# Altium PCB PC110.PcbDoc (part 8 of 24)
Units mm, origin at the board's own origin, x right, y up, seen from the top; angles counter-clockwise.
Board outline 150.05 x 107.35 mm, 10 copper layers (In2.Cu, F.Cu, B.Cu, In1.Cu, In3.Cu, In4.Cu, In5.Cu, In6.Cu, In7.Cu, In8.Cu); 936 components, 1434 nets, 4891 pads, 6088 vias.
Unrouted connection lines stored in the file: 2995.
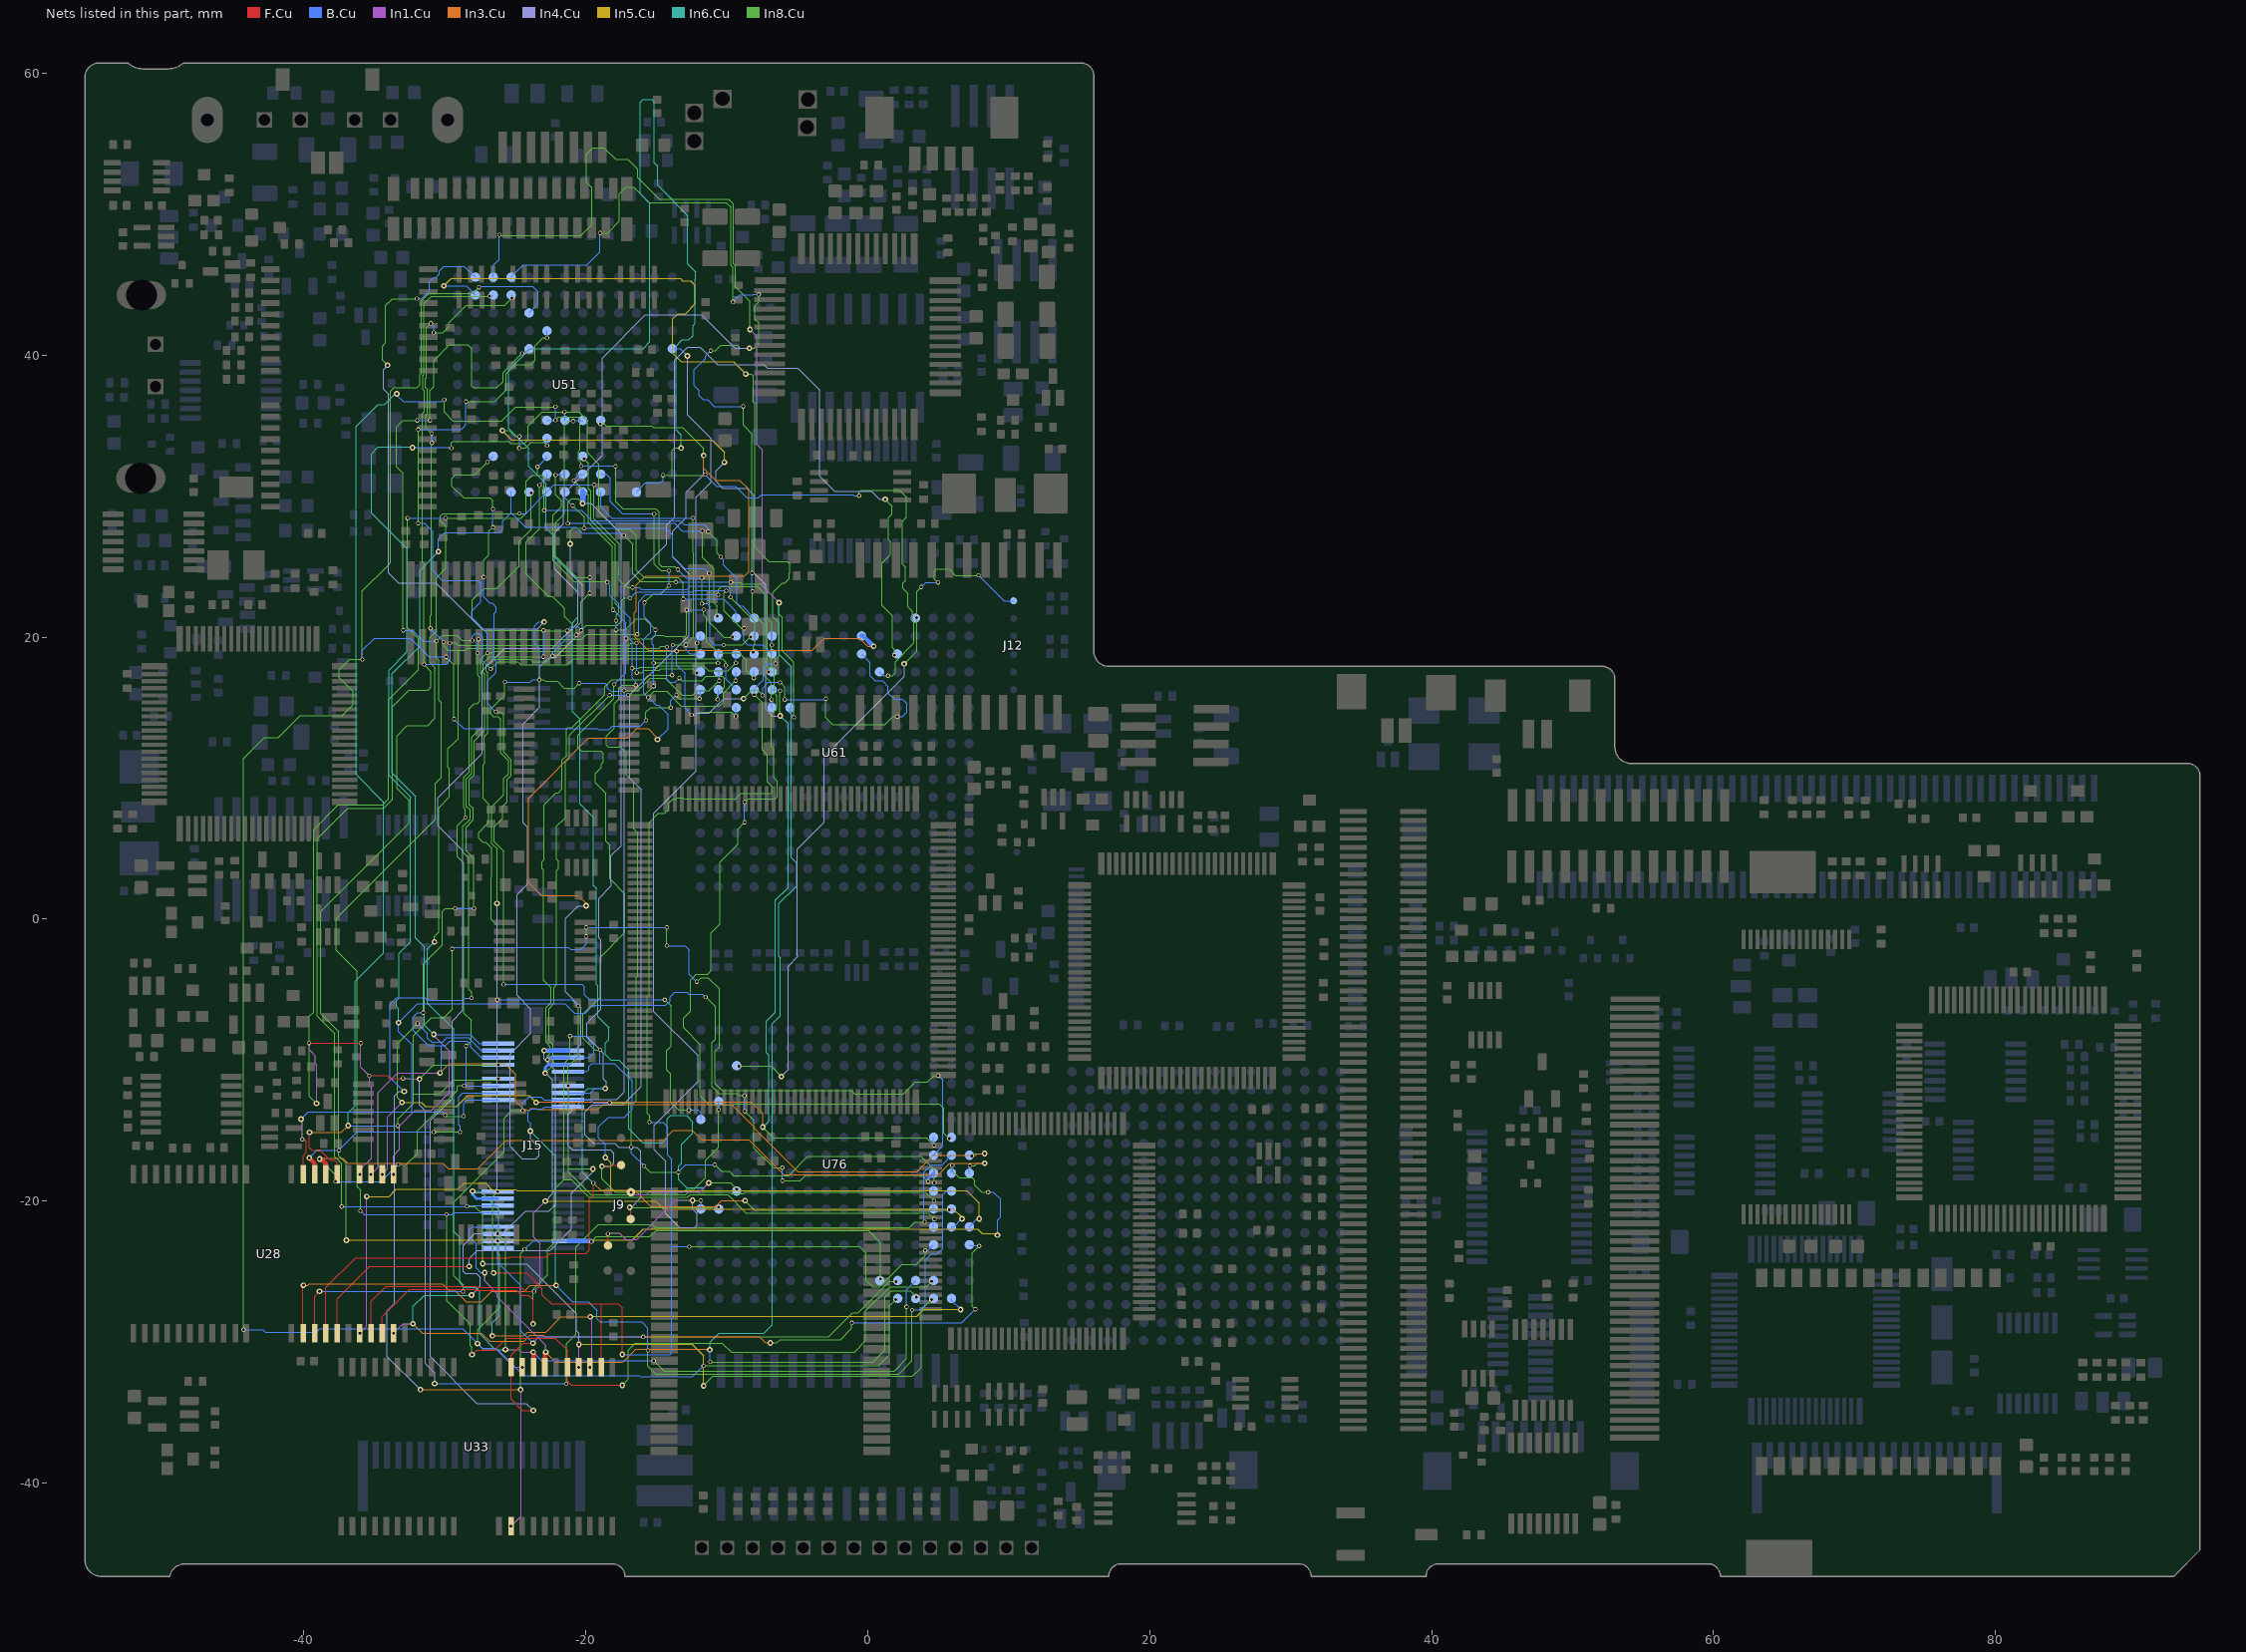
[diagram p15: the nets of this part, all layers, seen from the top]

## Via types
v1: diameter 0.3, hole 0.2, B.Cu to In8.Cu, tented both sides, 1934 vias
v2: diameter 0.4, hole 0.2, F.Cu to B.Cu, tented both sides, 1902 vias
v3: diameter 0.3, hole 0.2, F.Cu to In1.Cu, tented both sides, 1729 vias
v4: diameter 0.6, hole 0.3, F.Cu to B.Cu, tented both sides, 354 vias
v5: diameter 0.5, hole 0.3, F.Cu to B.Cu, tented both sides, 136 vias
v6: diameter 0.4, hole 0.2, B.Cu to In8.Cu, tented both sides, 12 vias
v7: diameter 0.3, hole 0.2, F.Cu to B.Cu, tented both sides, 6 vias
v8: diameter 0.6, hole 0.2, F.Cu to B.Cu, tented both sides, 4 vias
v9: diameter 0.5, hole 0.2, B.Cu to In8.Cu, tented both sides, 3 vias
v10: diameter 0.5, hole 0.2, F.Cu to B.Cu, tented both sides, 2 vias
v11: diameter 0.4, hole 0.3, F.Cu to B.Cu, tented both sides, 2 vias
v12: diameter 0.3, hole 0.2, F.Cu to In4.Cu, tented both sides, 2 vias
v13: diameter 0.6, hole 0.3, B.Cu to In8.Cu, tented both sides, 1 vias
v14: diameter 0.3, hole 0.2, F.Cu to In3.Cu, tented both sides, 1 vias

## Nets (pads, with @x,y where several pads share a name; then routed paths per layer and width w, separated by ;. In a path a pad name is that pad's centre, name@x,y a point inside that pad or via, vN(x,y) a via of type N, cw(c..) or ccw(c..) an arc to the next point about the centre after c; other vN are vias at no path point) (continued)
CPU_BE1#: J9.3 U51.L13 U61.L4 U76.C10 | length 174.7
  In1.Cu w0.08: v3(-16.795,-19.365) -16.64,-19.52 -15.67,-19.52 -15.49,-19.34 -11.91,-19.34 v2(-11.27,-18.7)
  In6.Cu w0.08: v2(-13.24,33.42) -13.24,34.34 -13.6,34.7 -13.6,40.64 -13.15,41.09 -12.69,41.09 -12.39,41.39 -12.39,42.1 -12.24,42.25 -12.24,45.33 -12.22,45.35 -12.22,45.92 -12.76,46.46 -12.76,49.92 -14.89,52.05 -14.89,53.4 -15.13,53.64 -15.13,57.95 -15.32,58.14 -15.95,58.14 -16.15,57.94 -16.15,51.46 -15.45,50.76 -15.45,40.95 -15.92,40.48 -23.95,40.48 -25.47,38.96 -25.47,34.8 -24.07,33.4 -24.07,32.13 -22.81,30.87 -22.81,27.75 -22.21,27.15 -22.21,25.68 -20.54,24.01 -20.54,21.45 -20.96,21.03 -20.96,14.74 -20.42,14.2 -20.42,8.19 -19.45,7.22 -19.45,2.4 -19.25,2.2 -19.25,-4.62 -19.13,-4.74 -19.13,-6.91 -18.35,-7.69 -18.35,-8.53 -18.6,-8.78 -18.6,-9.61 -18.22,-9.99 -17.66,-9.99 -16.94,-10.71 -16.94,-14.88 -15.96,-15.86 -14.53,-15.86 -14.21,-15.54 -14.21,-14.16 -13.98,-13.93 -12.86,-13.93 -12.41,-14.38 -12.41,-15.2 -13.19,-15.98 -13.19,-17.3 -13.4,-17.51 -13.4,-18.47 -12.84,-19.03 -11.6,-19.03 v2(-11.27,-18.7)
  In8.Cu w0.08: v1(-14.52,31.49) -13.87,31.49 ; v2(-13.24,33.42) -13.69,33.42 -13.86,33.25 -13.86,31.5 -13.87,31.49 ; v1(-11.53,31.53) -11.57,31.49 -13.87,31.49 ; v2(-11.27,-18.7) -9.75,-18.7 v1(-9.3,-19.15) ; v1(-0.61,30.03) -0.61,30.31 -0.48,30.44 2.25,30.44 2.75,29.94 2.75,28.52 2.45,28.22 2.45,25.19 2.67,24.97 2.67,23.99 2.51,23.83 2.51,23.45 2.84,23.12 2.84,22.14 3.16,21.82 3.16,21.2 3.29,21.07 3.29,19.59 1.96,18.26 1.96,17.47 1.76,17.27 v1(1.44,17.27)
  B.Cu w0.08: U51.L13@-16.4,30.3 -16.4,30.31 -15.77,30.94 -14.71,30.94 -14.52,31.13 v1(-14.52,31.49) ; v1(-11.53,31.53) -10.72,30.72 -9.39,30.72 -8.57,29.9 -7.77,29.9 -7.56,30.11 -1.05,30.11 -0.97,30.03 v1(-0.61,30.03) ; U61.L4@0.815,17.57 1.115,17.27 v1(1.44,17.27)
CPU_BE2#: J9.8 U51.N5 U61.K3 U76.A11 | length 106.9
  F.Cu w0.08: v3(-18.43,-22.32) -18.42,-22.33 J9.8@-18.42,-23.14
  In1.Cu w0.08: v3(-18.43,-22.32) -18.37,-22.26 -17.62,-22.26 -17.15,-22.73 -16.4,-22.73 -13.61,-19.94 v2(-12.42,-19.94)
  In4.Cu w0.08: v2(-12.79,39.95) -12.79,35.77 -11.11,34.09 -11.11,30.99 -12.16,29.94 -12.16,14.61 ; v2(-12.42,-19.94) -12.42,-20.56 -12.09,-20.89 -12.09,-21.68 -12.29,-21.88 -13.34,-21.88 -14.33,-20.89 -14.33,-17.16 -15.15,-16.34 -15.15,-14.61 -12.04,-11.5 -12.04,-9.68 -15.17,-6.55 -15.17,7.52 -12.16,10.53 -12.16,14.61 ; v2(-8.81,15.65) -10.2,15.65 -11.24,14.61 -12.16,14.61
  In8.Cu w0.08: v2(-12.42,-19.94) -12.4,-19.96 v1(-11.84,-19.96) ; v2(-8.81,15.65) -8.23,16.23 -7.8,16.23 v1(-7.45,15.88) ; v1(-6.21,16.8) -5.88,16.47 v1(-5.88,15.58) ; v1(-2.97,15.64) -2.97,14.29 -2.48,13.8 1.21,13.8 1.78,14.37 v1(2.1,14.37)
  B.Cu w0.08: U51.N5@-13.86,40.46 -13.3,40.46 v2(-12.79,39.95) ; U76.A11@-11.84,-20.55 v1(-11.84,-19.96) ; v1(-7.45,15.88) -7.45,16.4 -7.05,16.8 v1(-6.21,16.8) ; v1(-5.88,15.58) -3.03,15.58 v1(-2.97,15.64) ; U61.K3@-0.455,18.84 0.18,18.205 0.18,17.26 0.53,16.91 1.03,16.91 1.45,16.49 1.45,16.05 1.89,15.61 2.46,15.61 2.77,15.3 2.77,14.68 2.46,14.37 v1(2.1,14.37)
CPU_BE3#: J9.5 U51.J9 U61.K2 U76.B11 | length 121.2
  F.Cu w0.08: v2(-16.89,-20.44) -16.82,-20.51 J9.5@-16.82,-21.265
  In3.Cu w0.08: v2(-11.64,32.89) -11.64,31.98 -10.79,31.13 -9.09,31.13 -8.44,30.48 -8.44,24.67 -8.76,24.35 -15.76,24.35 -16.41,23.7 -16.41,21.88 -16.55,21.74 -16.55,20.05 -15.56,19.06 -3.95,19.06 -3.1,19.91 -0.58,19.91 -0.03,19.36 v2(0.42,19.36)
  In4.Cu w0.08: v2(-16.89,-20.44) -16.78,-20.44 -16.09,-19.75 -16.095,-19.745 -16.095,-16.465 -16.38,-16.18 -17.64,-16.18 -17.93,-15.89 -19.47,-15.89 -20.05,-15.31 -20.05,-13.67 -19.55,-13.17 -17.39,-13.17 -16.08,-11.86 -16.08,9.2 -16.88,10 -16.88,15.92 -12.67,20.13 -12.67,24.5 -13.85,25.68 -13.85,27.53 -12.9,28.48 -12.9,30.27 -11.64,31.53 v2(-11.64,32.89)
  In8.Cu w0.08: v1(-18.96,35.12) -18.68,35.12 -18.56,35 -15.34,35 -15.22,34.88 -13.13,34.88 -11.64,33.39 v2(-11.64,32.89) ; v2(-16.89,-20.44) -16.86,-20.47 -11.06,-20.47 -11.01,-20.42 v1(-10.58,-20.42)
  B.Cu w0.08: v1(-18.96,35.12) -18.96,35.36 U51.J9@-18.94,35.38
  B.Cu w0.3: U61.K2@-0.455,20.11 -0.34,20.11 0.41,19.36 v2(0.42,19.36)
CPU_BLAST#: J12.1 U61.N1 U76.C3 | length 51.3
  In4.Cu w0.08: v2(-6.13,-11.15) -5.65,-10.67 -5.65,-3.33 -4.96,-2.64 -5,-2.6 -5,4.98 -3.09,6.89 -3.09,11.54 2.59,17.22 v2(2.59,18.11)
  In8.Cu w0.08: v1(-9.13,-10.43) -6.85,-10.43 v2(-6.13,-11.15) ; v2(2.59,18.11) 3.47,18.99 v1(3.47,21.4) 3.47,23.24 v1(3.79,23.56) ; v1(4.98,23.89) 4.73,24.14 4.73,24.67 4.88,24.82 5.78,24.82 6.21,24.39 v1(7.86,24.39)
  B.Cu w0.08: U76.C3@-9.3,-10.39 -9.26,-10.43 v1(-9.13,-10.43) ; U61.N1@3.355,21.38 3.375,21.4 v1(3.47,21.4) ; v1(3.79,23.56) 4.12,23.89 v1(4.98,23.89) ; v1(7.86,24.39) 9.67,22.58 J12.1@10.35,22.58
CPU_BRDY#: J9.2 U61.M3 U76.B5 | length 117
  F.Cu w0.08: v2(-18.85,-17.53) -18.32,-17.53 -18.23,-17.44 J9.2@-17.495,-17.44
  In4.Cu w0.08: v2(-18.85,-17.53) -18.23,-17.53 -18.01,-17.31 -18.01,-16.63 -18.04,-16.6 -18.04,-16.58 -18.25,-16.37 -20.95,-16.37 -21.28,-16.04 -21.28,-13.85 -20.21,-12.78 -17.79,-12.78 -17.27,-12.26 -17.27,23.59 -14.27,26.59 -14.27,27.94 -13.71,28.5 -13.71,39.64 -12.77,40.58 -11.9,40.58 -10.65,39.33 -7.36,39.33 -7.13,39.1 -4.98,39.1 -3.42,37.54 -3.42,31.41 -2.35,30.34 0.28,30.34 0.85,29.77 1.23,29.77 v2(1.24,29.78)
  In8.Cu w0.08: v2(-18.85,-17.53) -18.85,-18.39 -17.89,-19.35 -13.05,-19.35 -12.86,-19.16 -12.33,-19.16 -11.51,-18.34 -11.51,-17.11 -10.57,-16.17 v1(-10.57,-13.5) ; v2(1.24,29.78) 1.73,29.29 1.73,28.73 1.47,28.47 1.47,26.93 1.62,26.78 1.62,25.87 1.01,25.26 1.01,22.25 1.75,21.51 1.75,19.26 1.89,19.12 v1(1.89,18.72)
  B.Cu w0.08: v1(-10.57,-13.5) U76.B5@-10.57,-12.93
CPU_BS16#: U51.C11 U76.A6 | length 67.3
  In8.Cu w0.08: v1(-27.23,24.27) -27.23,25.46 -26.87,25.82 -26.87,27.51 v1(-26.58,27.8) ; v1(-26.98,32.42) -27.89,31.51 -29.25,31.51 -29.49,31.27 -29.49,30.71 -28.66,29.88 -26.8,29.88 -26.59,29.67 v1(-26.59,29.1) ; v1(-26.38,14.7) -26.03,14.7 -25.84,14.51 -25.84,11.85 -25.28,11.29 -25.28,10.21 -25.59,9.9 -25.59,8.33 -25.9,8.02 -25.9,7.15 -26.49,6.56 -26.49,5.5 -25.82,4.83 v1(-25.82,-4.63) ; v1(-14.4,-5.71) -13.96,-6.15 -13.96,-9.01 -14.26,-9.31 -14.26,-10.7 -13.97,-10.99 -13.97,-12.99 -13.42,-13.54 v1(-12.68,-13.54)
  B.Cu w0.08: v1(-27.23,24.27) -27.23,22.86 -26.81,22.44 -26.65,22.44 -26.34,22.13 -26.34,21.83 -26.49,21.68 -26.49,18.39 -26.37,18.27 -26.37,17.52 -26.97,16.92 -26.97,15.29 v1(-26.38,14.7) ; v1(-26.98,32.42) U51.C11@-26.56,32.84 ; v1(-26.59,29.1) -26.59,27.81 v1(-26.58,27.8) ; v1(-25.82,-4.63) -20.27,-4.63 -20.09,-4.81 -20.09,-5.36 -19.75,-5.7 -14.41,-5.7 v1(-14.4,-5.71) ; v1(-12.68,-13.54) -12.04,-13.54 -11.84,-13.74 U76.A6@-11.84,-14.2
CPU_D0: J15.1 U28.2 U51.D13 U61.E2 U76.R7 | length 146.9
  In1.Cu w0.08: v3(-33.635,-18.095) -33.635,-16.765 -33.2,-16.33 -33.2,-14.65 -32.11,-13.56 -30.95,-13.56 -29.69,-12.3 -29.69,-9.35 -30.78,-8.26 v2(-30.78,-8.17)
  In6.Cu w0.08: v2(-30.78,-8.17) -31.44,-7.51 -31.44,-1.98 -32.08,-1.34 -32.08,8.73 -33.73,10.38 -33.73,17.41 -31.78,19.36 -31.78,24.74 v2(-30.45,26.07)
  In8.Cu w0.08: v1(-17.3,27.23) -16.67,26.6 -16.67,24.53 -16.11,23.97 -13.66,23.97 v1(-13.6,23.91) v1@-13.6,23.92 ; v1(-9.71,23.9) -9.69,23.88 -9.02,23.88 -8.93,23.79 -7.54,23.79 -7.12,23.37 -7.12,21.35 -6.805,21.035 v1(-6.805,19.44) -6.83,19.415 -6.83,17.92 -6.64,17.73 -6.64,16.03 -6.46,15.85 -6.46,14.92 -6.84,14.54 -6.84,12.24 -6.65,12.05 -6.65,10.01 -6.41,9.77 -6.41,8.69 -6.58,8.52 -8.51,8.52 v1(-8.73,8.3) ; v1@-8.74,6.86 v1@-8.73,6.87 ; v1(-8.73,6.88) v1@-8.73,6.87 ; v1(5.78,-15.55) 5.4,-15.17 5.4,-13.42 5.07,-13.09 -9.49,-13.09 -9.56,-13.16 -11.26,-13.16 -11.88,-12.54 -11.88,-8.88 -13.07,-7.69 -13.07,-7.03 -12.56,-6.52 -12.56,-4.31 -12.46,-4.21 -12.16,-3.91 -11.84,-3.91 -11.38,-3.91 -11.26,-3.79 -11.11,-3.64 -11.11,-1.18 -11.11,-0.97 -10.66,-0.52 -10.47,-0.33 -10.47,4.06 -9.29,5.24 -9.22,5.31 -9.22,6.27 -9.22,6.38 v1@-8.73,6.87
  B.Cu w0.08: v2(-30.78,-8.17) -28.2,-8.17 -27.55,-8.82 -26.17,-8.82 J15.1@-26.16,-8.83 ; v2(-30.45,26.07) -30.45,26.96 -29.98,27.43 -26.1,27.43 -25.88,27.65 -25.88,28.24 -25.3,28.82 -25.29,28.82 ; U51.D13@-25.29,30.3 -25.29,28.82 ; v1(-17.3,27.23) -17.47,27.4 -20.28,27.4 -20.68,27.8 -24.27,27.8 -25.29,28.82 ; v1(-13.6,23.91) -9.72,23.91 v1(-9.71,23.9) ; v1(-8.73,6.88) v1(-8.73,8.3) ; v1(-6.805,19.44) U61.E2@-6.805,20.11 ; v1(5.78,-15.55) 5.86,-15.55 U76.R7@5.94,-15.47
CPU_D1: J15.2 U28.3 U51.F10 U61.E5 U76.P7 | length 136
  In1.Cu w0.08: v3(-34.435,-18.095) -34.05,-17.71 -34.05,-14.01 v2(-33.04,-13)
  In3.Cu w0.08: v2(-23.52,-13) -23.48,-12.96 -8.28,-12.96 -7.45,-13.79 v2(-7.45,-14.75)
  In4.Cu w0.08: v2(-10.17,32.41) -10.77,31.81 -10.77,31.05 -10.3,30.58 -8.58,30.58 -8.08,30.08 -8.08,24.56 -7.24,23.72 -7.24,14.9 -6.76,14.42 v2(-6.21,14.42)
  In5.Cu w0.08: v2(-33.04,-13) -31.66,-13 -31.38,-13.28 -29.15,-13.28 -28.38,-12.51 -24.01,-12.51 v2(-23.52,-13) ; v2(-25.92,34.66) -25.25,33.99 -11.06,33.99 -10.17,33.1 v2(-10.17,32.41)
  In6.Cu w0.08: v2(-7.45,-14.75) -7.025,-14.325 -7.025,-9.625 -7.175,-9.475 -7.175,-7.225 -6.55,-6.6 -6.55,1.35 -5.65,2.25 -5.65,13.86 v2(-6.21,14.42)
  In8.Cu w0.08: v2(-33.04,-13) -33.37,-12.67 -33.37,-8.83 v1(-31.94,-7.4) ; v2(-25.92,34.66) -25.42,34.66 -25,34.24 v1(-24.7,34.24) ; v1(-24.72,33.42) -24.26,33.42 -23.87,33.81 -22.97,33.81 v1(-22.75,33.59) ; v2(-7.45,-14.75) -6.71,-15.49 4.16,-15.49 v1(4.7,-16.03) ; v1(-6.22,16.19) -6.22,14.43 v2(-6.21,14.42)
  B.Cu w0.08: v1(-31.94,-7.4) -31.22,-8.12 -31.22,-8.44 -30.93,-8.73 -30.17,-8.73 -29.84,-8.4 -28.34,-8.4 -27.42,-9.32 -26.17,-9.32 J15.2@-26.16,-9.33 ; v1(-24.72,33.42) -24.7,33.44 v1(-24.7,34.24) ; v1(-22.75,33.59) U51.F10@-22.75,34.11 ; U61.E5@-6.785,16.275 -6.305,16.275 v1(-6.22,16.19) ; U76.P7@4.67,-15.47 4.67,-16 v1(4.7,-16.03)
CPU_D2: J15.3 U28.4 U51.E13 U61.E3 U76.T8 | length 140.8
  In1.Cu w0.08: v3(-35.235,-18.095) -34.72,-17.58 -34.72,-12.28 -33.34,-10.9 v2(-30.34,-10.9)
  In3.Cu w0.08: v2(-30.34,-10.9) -29.69,-10.25 -25.74,-10.25 -24.99,-11 -24.99,-12.88 -24.36,-13.51 -23.99,-13.51 -23.9,-13.42 -23.52,-13.42 -23.44,-13.5 -19.14,-13.5 -18.77,-13.13 -9.67,-13.13 -8.04,-14.76 -8.04,-14.84 -4.96,-17.92 3.47,-17.92 4.66,-16.73 7.67,-16.73 7.78,-16.62 v2(8.29,-16.62)
  In8.Cu w0.08: v1(-31.53,-6.63) -31.53,-3.16 -30.18,-1.81 -30.18,0.54 -29.95,0.77 v1(-29.27,0.77) ; v1(-27.93,0.77) -27.93,4.31 -28.48,4.86 -28.48,6.53 -27.97,7.04 -27.97,7.85 -28.25,8.13 -28.25,9.9 -27.9,10.25 -27.9,12.65 -27.15,13.4 -27.15,17.38 -27.26,17.49 -27.26,18.15 -26.8,18.61 v1(-23.01,18.61) ; v1(-23.87,30.22) -23.88,30.21 -23.88,27.62 -24.73,26.77 -24.73,25.02 -24.75,25.02 -26.32,23.45 -27.22,23.45 -28.04,22.63 -28.04,21.3 -27.23,20.49 v1(-22.99,20.49) -22.96,20.46 v1(-21.31,20.46) ; v1(-20.33,20.49) -19.99,20.83 -17.78,20.83 -17.42,21.19 -17.42,22.64 -17.29,22.77 v1(-16.86,22.77) ; v1(-10.04,23.3) -10.19,23.15 -10.19,21.86 -8.955,20.625 v1(-8.77,20.625) ; v1(7.38,-16.79) 7.55,-16.62 v2(8.29,-16.62)
  B.Cu w0.08: v1(-31.53,-6.63) -31.93,-6.63 -32.25,-6.95 -32.25,-7.86 -31.15,-8.96 -30.25,-8.96 ; v2(-30.34,-10.9) -30.24,-10.8 -30.24,-8.97 -30.25,-8.96 ; v1(-29.27,0.77) v1(-27.93,0.77) ; J15.3@-26.16,-9.83 -26.17,-9.82 -27.43,-9.82 -28.17,-9.08 -28.17,-8.9 -28.43,-8.64 -29.63,-8.64 -29.95,-8.96 -30.25,-8.96 ; U51.E13@-24.02,30.3 -23.94,30.22 v1(-23.87,30.22) ; v1(-23.01,18.61) -22.99,18.63 v1(-22.99,20.49) ; v1(-21.31,20.46) -21.04,20.73 -20.57,20.73 v1(-20.33,20.49) ; v1(-16.86,22.77) -16.43,23.2 -12.46,23.2 -12.35,23.31 -10.05,23.31 v1(-10.04,23.3) ; v1(-8.77,20.625) -8.77,19.73 -8.52,19.48 -7.445,19.48 U61.E3@-6.805,18.84 ; U76.T8@7.21,-16.74 7.26,-16.79 v1(7.38,-16.79)
CPU_D3: J15.4 U28.5 U51.F11 U61.D1 U76.R8 | length 184.2
  F.Cu w0.08: v3(-39.63,-8.78) -35.97,-8.78 v3(-35.96,-8.79) ; v3(-35.36,-11.1) -34.1,-11.1 -33.91,-11.29 v3(-32.96,-11.29)
  In1.Cu w0.08: v3(-39.63,-8.78) -39.63,-9.26 -39.19,-9.7 -39.19,-10.24 -39.1,-10.33 v2(-39.1,-13.06) ; v3(-36.035,-18.095) -36.035,-17.775 -35.21,-16.95 -35.21,-11.96 -35.34,-11.83 -35.34,-11.12 v3(-35.36,-11.1) -35.96,-10.5 v3(-35.96,-8.79) ; v3(-32.96,-11.29) -32.95,-11.28 -32.52,-11.28 -32.45,-11.35 -31.8,-11.35 v2(-31.79,-11.34)
  In4.Cu w0.08: v2(-31.79,-11.34) -31.79,-13.18 -31.38,-13.59 -31.38,-31.52 -30.72,-32.18 v2(-30.72,-32.93)
  In8.Cu w0.08: v2(-39.1,-13.06) -39.6,-12.56 -39.6,-6.88 -39.3,-6.58 -39.3,6.36 -37.55,8.11 -34.42,8.11 -33.98,8.55 -33.98,15.58 -31.86,17.7 -31.86,19.88 -32.64,20.66 v1(-32.64,28.45) ; v2(-31.79,-11.34) -31.79,-11.33 -30.81,-10.35 -26.23,-10.35 v1(-26.2,-10.32) ; v1(-29.95,28.46) -24.59,28.46 -24.24,28.81 -24.24,31.07 -23.81,31.5 -23.43,31.5 ; v1(-23.42,32.09) -23.42,31.51 -23.43,31.5 ; v1(-22.96,29.01) -22.96,31.36 -23.1,31.5 -23.43,31.5 ; v1(-21.38,-32.95) -21.38,-30.12 -20.68,-29.42 -20.68,-23.26 -19.09,-21.67 -15.29,-21.67 -15.08,-21.88 2.94,-21.88 3.35,-21.47 v1(4.03,-21.47) ; v1(-11.32,27.49) -10.69,26.86 -10.69,25.96 v1(-10.43,25.7)
  B.Cu w0.08: v1(-32.64,28.45) -29.96,28.45 v1(-29.95,28.46) ; v2(-30.72,-32.93) -30.7,-32.95 v1(-21.38,-32.95) ; v1(-23.42,32.09) -22.75,32.76 U51.F11@-22.75,32.84 ; v1(-22.96,29.01) -20.3,29.01 -19.57,28.28 -13.31,28.28 -13.03,28 -11.61,28 -11.32,27.71 v1(-11.32,27.49) ; v1(-10.43,25.7) -10.24,25.51 -10.24,25.12 -9.27,24.15 -9.27,22.41 -9.07,22.21 -8.905,22.21 U61.D1@-8.075,21.38 ; v1(4.03,-21.47) 3.98,-21.42 3.98,-17.95 4.53,-17.4 5.28,-17.4 U76.R8@5.94,-16.74
CPU_D4: J15.6 U28.7 U51.F9 U61.D2 U76.P8 | length 185
  F.Cu w0.08: v2(-39.6,-15.12) -39.6,-16.2 -39.41,-16.39 -38.82,-16.39 -38.13,-17.08 -37.83,-17.08 -37.635,-17.275 U28.7@-37.635,-18.095
  In3.Cu w0.08: v2(-39.6,-15.12) -37.34,-15.12 v2(-36.86,-14.64)
  In6.Cu w0.08: v2(-36.86,-14.64) -36.86,-13.74 -36.36,-13.24 -36.36,-4.4 -34.33,-2.37 -34.33,8.3 -36.29,10.26 -36.29,34.94 -34.73,36.5 -34.29,36.5 -33.53,37.26 v2(-33.41,37.26)
  In8.Cu w0.08: v1(-33.33,-14.65) -33.33,-14.16 -32.22,-13.05 -32.22,-12.39 ; v1(-30.04,36.84) -30.04,35.96 -29.43,35.35 -25.95,35.35 -24.97,36.33 -22.16,36.33 v1(-22.15,36.34) ; v1(-29.48,-2.1) -29.47,-2.11 -29.47,-6.37 -30.08,-6.98 -30.96,-6.98 -32.22,-8.24 -32.22,-12.39 ; v1(-26.2,-11.32) -26.27,-11.39 -29.35,-11.39 -30.35,-12.39 -32.22,-12.39 ; v1(-22.15,35.39) -21.93,35.61 -20.57,35.61 -20.4,35.44 -20.4,33.27 -20.53,33.14 -20.53,32.57 -20.33,32.37 v1(-20.33,32.14) ; v1(-19.98,-0.58) -19.97,-0.59 v1(-19.97,-1.22) ; v1(-17.88,32.12) -17.88,29.62 -17.39,29.13 -15.05,29.13 -14.78,28.86 -14.78,25.2 -14.61,25.03 -13.7,25.03 v1(-13.47,24.8) ; v1(-14.25,-1.88) -14.25,-0.59 v1(-14.24,-0.58) ; v1(-12.13,-4.43) -11.84,-4.14 -11.32,-4.14 -10.53,-4.93 -10.53,-9.07 -10.83,-9.37 -10.83,-11.66 -10.33,-12.16 -1.15,-12.16 -0.92,-12.39 2.53,-12.39 3.37,-11.55 4.24,-11.55 4.71,-11.08 v1(5,-11.08) ; v1(-11.76,22.38) v1(-11.76,24.21) ; v1(-10.22,19.45) -8.88,19.45 v1(-8.31,20.02)
  B.Cu w0.08: v2(-36.86,-14.64) -33.34,-14.64 v1(-33.33,-14.65) ; v2(-33.41,37.26) -33.41,37.19 -32.92,36.7 -30.18,36.7 v1(-30.04,36.84) ; v1(-29.48,-2.1) -29.37,-1.99 -21.24,-1.99 -21.08,-2.15 -20.36,-2.15 -19.97,-1.76 v1(-19.97,-1.22) ; U51.F9@-22.75,35.38 -22.16,35.38 v1(-22.15,35.39) v1(-22.15,36.34) ; v1(-20.33,32.14) -17.9,32.14 v1(-17.88,32.12) ; v1(-19.98,-0.58) v1(-14.24,-0.58) ; v1(-14.25,-1.88) -12.94,-1.88 -12.66,-2.16 -12.66,-3.9 v1(-12.13,-4.43) ; v1(-13.47,24.8) -12.88,24.21 v1(-11.76,24.21) ; v1(-11.76,22.38) -11.39,22.38 -11.18,22.17 -11.18,19.77 -10.86,19.45 v1(-10.22,19.45) ; v1(-8.31,20.02) -8.165,20.02 U61.D2@-8.075,20.11 ; U76.P8@4.67,-16.74 5.34,-16.07 5.34,-11.42 v1(5,-11.08)
CPU_D5: J15.7 U28.8 U51.F12 U61.E4 U76.T9 | length 147.4
  F.Cu w0.3: v2(-38.88,-17.01) -38.74,-17.01 -38.435,-17.315 U28.8@-38.435,-18.095
  In3.Cu w0.08: v2(-38.88,-17.01) -38.83,-16.96 -37.25,-16.96 -36.9,-17.31 -30.14,-17.31 -29.75,-17.7 -27.68,-17.7 -25.65,-15.67 -14.49,-15.67 -13.81,-14.99 -12.45,-14.99 -11.79,-15.65 -8.43,-15.65 -5.96,-18.12 5.02,-18.12 5.83,-17.31 v2(8.29,-17.31)
  In8.Cu w0.08: v2(-38.88,-17.01) -37.75,-18.14 v1(-37.75,-18.6) ; v1(-33.31,-17.39) -32.71,-17.39 -31.94,-16.62 -31.94,-15 -29.1,-12.16 -29.1,-11.85 -29.06,-11.81 v1(-28.63,-11.81) ; v1(-28.49,-9) -28.13,-8.64 -28.13,-7.16 -28.64,-6.65 -28.64,3.99 -29.1,4.45 -29.1,6.64 v1(-28.53,7.21) -28.53,7.77 -28.65,7.89 -28.65,10.08 -28.28,10.45 -28.28,14.94 -27.92,15.3 -27.69,15.3 -27.52,15.47 -27.52,17.15 -27.68,17.31 v1(-27.68,18.88) ; v1(-27.61,19.86) -20.95,19.86 ; v1(-23.28,30.8) -23.28,27.69 -24.22,26.75 -24.22,24.47 -22.65,22.9 -22.36,22.9 -21.52,22.06 -21.52,21.48 -20.95,20.91 -20.95,19.86 ; v1(-16.35,20.21) -19.95,20.21 -20.3,19.86 -20.95,19.86 ; v1(-10.6,23.02) -10.6,23.38 -10.39,23.59 -7.84,23.59 -7.3,23.05 -7.3,21.25 -7.13,21.08 -7.13,17.91 -7.03,17.81 v1(-7.03,17.54) ; v1(7.25,-17.49) 7.58,-17.49 7.76,-17.31 v2(8.29,-17.31)
  B.Cu w0.08: v1(-37.75,-18.6) -34.52,-18.6 v1(-33.31,-17.39) ; v1(-28.49,-9) -28.49,-11.67 v1(-28.63,-11.81) -28.62,-11.82 -26.17,-11.82 J15.7@-26.16,-11.83 ; v1(-27.68,18.88) -27.61,18.95 v1(-27.61,19.86) ; v1(-23.28,30.8) -23.28,30.81 -22.75,31.34 U51.F12@-22.75,31.57 ; v1(-16.35,20.21) -16.23,20.33 -16.23,22.52 -15.73,23.02 v1(-10.6,23.02) ; v1(-7.03,17.54) -6.835,17.54 U61.E4@-6.805,17.57 ; U76.T9@7.21,-18.01 7.21,-17.53 v1(7.25,-17.49)
CPU_D6: J15.8 U28.9 U51.F13 U61.D3 U76.R9 | length 163.8
  F.Cu w0.3: v2(-39.61,-16.93) -39.235,-17.305 U28.9@-39.235,-18.095
  In5.Cu w0.08: v2(-36.98,-22.77) -16.7,-22.77 -15.91,-21.98 7.8,-21.98 8.13,-22.31 9.1,-22.31 v2(9.2,-22.41)
  In8.Cu w0.08: v1@-37.53,-16.36 -37.52,-16.35 -37.52,-7.98 -38.8,-6.7 -38.8,0.53 -32.54,6.79 -32.54,8.42 -33.407,9.287 -33.407,13.003 -32.67,13.74 -31.21,13.74 -30.69,14.26 -30.69,17.85 -31.04,18.2 -31.04,19.98 -30.61,20.41 -30.61,24.19 -29.91,24.89 -29.91,27.83 -30.3,28.22 -30.3,28.61 -30.14,28.77 v1(-24.71,28.77) ; v1(-37.51,-16.39) -37.51,-16.77 -36.98,-17.3 v2(-36.98,-22.77) ; v1(-30.78,-15.095) -28.915,-15.095 v1(-28.91,-15.1) ; v1(-19.41,30.81) -19.41,28.41 -17.61,26.61 -17.61,24.04 -17.1,23.53 v1(-16.68,23.53) ; v1(-9.73,22.83) -7.99,21.09 -7.99,19.5 -8.12,19.37 v1(-8.12,18.93) ; v1(6,-17.47) 6,-17.86 6.48,-18.34 7.4,-18.34 7.59,-18.53 7.59,-18.88 8.07,-19.36 v1(8.54,-19.36)
  B.Cu w0.08: v2(-39.61,-16.93) -39.07,-16.39 v1(-37.51,-16.39) -36.215,-15.095 v1(-30.78,-15.095) ; v1(-28.91,-15.1) -28.91,-14.7 -29.01,-14.6 -29.01,-12.62 -28.72,-12.33 J15.8@-26.16,-12.33 ; v1(-24.71,28.77) -24.28,28.77 U51.F13@-22.75,30.3 -22.24,30.81 v1(-19.41,30.81) ; v1(-16.68,23.53) -16.22,23.53 -16.06,23.37 -12.8,23.37 -12.55,23.62 -9.95,23.62 -9.73,23.4 v1(-9.73,22.83) ; v1(-8.12,18.93) -8.12,18.885 U61.D3@-8.075,18.84 ; U76.R9@5.94,-18.01 5.94,-17.53 v1(6,-17.47) ; v1(8.54,-19.36) 8.9,-19.36 9.41,-19.87 9.41,-21.12 9.2,-21.33 v2(9.2,-22.41)
CPU_D7: J15.9 U28.10 U51.G9 U61.C1 U76.P9 | length 161.6
  F.Cu w0.08: v3(-40.11,-15.61) -39.97,-15.61 -39.81,-15.77 -39.81,-16.54 -40.035,-16.765 U28.10@-40.035,-18.095
  In1.Cu w0.08: v2(-40.2,-14.18) -40.11,-14.27 v3(-40.11,-15.61)
  In6.Cu w0.08: v2(-33.28,-7.34) -33.28,-6.37 -33.43,-6.22 -33.43,-5.75 -33.26,-5.58 -33.26,-2.43 -32.44,-1.61 -32.44,8.67 -33.97,10.2 -33.97,17.65 -32.67,18.95 -32.67,26.27 -35.21,28.81 -35.21,33.02 -34.72,33.51 -32.36,33.51 v2(-32.3,33.45)
  In8.Cu w0.08: v1(-29.98,-13.89) -29.9,-13.97 v1(-28.67,-13.97) ; v1(-29.54,33.41) -29.54,33.79 -29.44,33.89 -25.47,33.89 -25.34,33.76 -24.35,33.76 -24.08,34.03 -24.08,34.99 -23.09,35.98 v1(-21.51,35.98) -20.49,35.98 -19.89,35.38 -19.89,33.1 -19.06,32.27 -19.06,28.88 -17.84,27.66 -16.88,27.66 -16.41,27.19 -16.41,24.78 -15.86,24.23 -13.46,24.23 -13.08,23.85 v1(-13.08,22.72) ; v1(-11.51,-5.51) -10.8,-6.22 -10.8,-8.5 -11.04,-8.74 -11.04,-11.88 -10.57,-12.35 -9.27,-12.35 -9.11,-12.51 v1(-8.75,-12.51) ; v1(-8.73,-13.61) -8.06,-14.28 -8.06,-16.23 -6.66,-17.63 v1(-6.06,-17.63) ; v1(-6.04,-18.54) -4.78,-18.54 -4.4,-18.16 3.83,-18.16 v1(4.28,-18.61)
  B.Cu w0.08: v2(-40.2,-14.18) -39.7,-13.68 -32.33,-13.68 ; v2(-32.3,33.45) -29.58,33.45 v1(-29.54,33.41) ; v1(-29.98,-13.89) -30.19,-13.68 -32.33,-13.68 ; v1(-28.67,-13.97) -28.67,-13.07 -28.43,-12.83 J15.9@-26.16,-12.83 ; v1(-21.51,35.98) -21.48,35.95 U51.G9@-21.48,35.38 ; v1(-13.08,22.72) -10.22,22.72 -9.345,21.845 U61.C1@-9.345,21.38 ; v1(-11.51,-5.51) -11.7,-5.32 -12.69,-5.32 -12.82,-5.19 -13.69,-5.19 -14.01,-5.51 -14.01,-5.8 -14.32,-6.11 -19.49,-6.11 -20.04,-6.66 -20.8,-6.66 -21.46,-6 -31.93,-6 -33.27,-7.34 v2(-33.28,-7.34) -33.28,-7.96 -32.33,-8.91 -32.33,-13.68 ; v1(-8.75,-12.51) -8.75,-13.59 v1(-8.73,-13.61) ; v1(-6.06,-17.63) -6.06,-18.52 v1(-6.04,-18.54)
  B.Cu w0.2: v1(4.28,-18.61) 4.28,-18.4 U76.P9@4.67,-18.01
CPU_D8: J15.51 U28.35 U51.G13 U61.C2 U76.R10 | length 155.8
  F.Cu w0.08: U28.35@-40.035,-29.37 -40.06,-29.345 -40.06,-25.99 v2(-40.03,-25.96)
  In3.Cu w0.08: v2(-40.03,-25.96) -39.71,-25.96 -39.61,-25.86 -30.18,-25.86 -29.67,-26.37 -29.26,-26.37 -28.49,-27.14 -27.41,-27.14 -26.67,-26.4 -24.39,-26.4 -23.96,-25.97 v2(-22.1,-25.97)
  In4.Cu w0.08: v2(-23.93,-15.03) -23.93,-15.62 -23.3,-16.25 -23.3,-16.76 -23.52,-16.98 -24.5,-16.98 -25.38,-16.1 -25.38,-9.55 -23.92,-8.09 -23.92,-6.37 -24.88,-5.41 -24.88,1.76 -24.14,2.5 -24.14,6.52 -24.46,6.84 -24.46,13.85 -23.28,15.03 -23.28,17.9 -22.65,18.53 -22.18,18.53 -20.23,20.48 -20.23,23.69 -21.1,24.56 v2(-21.1,26.62)
  In6.Cu w0.08: v2(-23.93,-15.03) -22.14,-16.82 -22.14,-25.93 v2(-22.1,-25.97)
  In8.Cu w0.08: v2(-21.1,26.62) -21.1,27.55 -20.91,27.74 v1(-20.11,27.74) -20.11,28.506 v1(-20.931,29.327) ; v1(-15.59,-30.58) -15.59,-31.7 -15.04,-32.25 2.22,-32.25 3.15,-31.32 v1(3.15,-27.72) ; v1(-11.25,24.54) -11.23,24.52 -11.23,21.04 -10.2,20.01 v1(-9.59,20.01)
  B.Cu w0.08: v2(-23.93,-15.03) -23.93,-14.48 -24.08,-14.33 -24.08,-13.68 -23.87,-13.47 -23.08,-13.47 -22.93,-13.32 -21.22,-13.32 J15.51@-21.21,-13.33 ; v2(-22.1,-25.97) -22.1,-25.98 -20.96,-27.12 -19.83,-27.12 -19.21,-27.74 -19.21,-28.33 -18.98,-28.56 -16.03,-28.56 -15.59,-29 v1(-15.59,-30.58) ; U51.G13@-21.48,30.3 -21.48,29.88 -20.931,29.331 v1(-20.931,29.327) ; v1(-20.11,27.74) -14.35,27.74 -13.85,27.24 -13.85,25.73 -12.98,24.86 -11.57,24.86 v1(-11.25,24.54) ; v1(-9.59,20.01) -9.445,20.01 U61.C2@-9.345,20.11 ; v1(3.15,-27.72) 3.71,-27.72 4.07,-27.36 4.07,-24.18 4.52,-23.73 4.95,-23.73 5.34,-23.34 5.34,-19.52 5.58,-19.28 U76.R10@5.94,-19.28
CPU_D9: J15.52 U28.36 U51.G12 U61.C3 U76.P10 | length 128.6
  F.Cu w0.08: U28.36@-39.235,-29.37 -39.235,-26.735 v2(-38.89,-26.39)
  In8.Cu w0.08: v1(-28.7,-26.42) -28.7,-25.94 -29.35,-25.29 -29.35,-20.07 -25.79,-16.51 -25.79,-14.11 -25.25,-13.57 v1(-24.48,-13.57) ; v1(-22.14,31.51) -22.14,30.1 -21.73,29.69 -21.73,29.25 -22.34,28.64 -22.34,25.44 -20.84,23.94 -18.48,23.94 -18.48,23.92 v1(-18.47,23.91) ; v1(-18.3,-13.02) -16.77,-13.02 ; v1(-16.77,-16.17) -16.77,-13.02 ; v1(-16.71,17.8) -16.25,17.8 -16.18,17.87 -15.01,17.87 -14.89,17.99 -11.66,17.99 -11.28,17.61 -9.92,17.61 ; v1(-16.45,16.6) -17.42,16.6 -17.65,16.37 -17.65,15.62 -17.97,15.3 -17.97,13.55 -18.54,12.98 -18.54,12.35 -18.41,12.22 -17.534,12.22 -17.14,11.826 -17.14,10.22 -16.61,9.69 -16.61,6.42 -16.3,6.11 -16.3,-4.025 -16.42,-4.145 -16.42,-12.84 -16.6,-13.02 -16.77,-13.02 ; v1(-15.87,-17.51) -15.43,-17.95 v1(-13.44,-17.95) ; -11.26,17.61 -9.92,17.61 ; v1(-10.85,-17.42) -10.38,-17.89 -9.81,-17.89 -9.51,-18.19 -5.61,-18.19 -4.25,-16.83 3.78,-16.83 4.72,-17.77 v1(4.72,-18.71) ; v1(-9.35,18.18) -9.815,17.715 -9.92,17.61
  B.Cu w0.08: v2(-38.89,-26.39) -28.73,-26.39 v1(-28.7,-26.42) ; v1(-24.48,-13.57) -24.48,-13.07 -24.03,-12.62 -23.17,-12.62 -22.97,-12.82 -19.67,-12.82 -19.47,-13.02 v1(-18.3,-13.02) ; v1(-22.14,31.51) -22.08,31.57 U51.G12@-21.48,31.57 ; v1(-18.47,23.91) -18.28,23.72 -18.28,22.98 -17.66,22.36 -17.66,22.16 -16.83,21.33 -16.83,19.8 -16.7,19.67 -16.7,17.81 v1(-16.71,17.8) -16.71,17.1 -16.45,16.84 v1(-16.45,16.6) ; v1(-16.77,-16.17) -16.77,-16.6 -15.87,-17.5 v1(-15.87,-17.51) ; v1(-13.44,-17.95) -12.91,-17.42 v1(-10.85,-17.42) ; v1(-9.35,18.18) -9.345,18.185 U61.C3@-9.345,18.84 ; U76.P10@4.67,-19.28 4.67,-18.76 v1(4.72,-18.71)
CPU_D10: J15.53 U28.37 U51.H13 U61.B1 U76.R11 | length 130.2
  F.Cu w0.08: U28.37@-38.46,-29.37 -38.435,-29.345 -38.435,-26.125 -36.33,-24.02 -25.466,-24.02 -25.416,-23.97 -22.78,-23.97 -22.53,-23.72 -20,-23.72 -19.74,-23.46 -19.74,-19.85 -19.46,-19.57 v7(-19.46,-18.71)
  In3.Cu w0.08: v7(-19.46,-18.71) -18.94,-19.23 -16.54,-19.23 -15.38,-20.39 -10.79,-20.39 -10.36,-19.96 v2(-8.7,-19.96)
  In4.Cu w0.08: v2(-20.23,29.49) -19.62,29.49 -17.48,27.35 -17.48,5.23 -18.205,4.505 -18.205,2.585 -18.19,2.57 -18.19,2.37 -19.08,1.48 -19.08,-1.32 -18.94,-1.46 -18.94,-6.4 -19.91,-7.37 -19.91,-8.34 -18.77,-9.48 -18.77,-11.34 -18.55,-11.56 -18.55,-11.93 v2(-18.62,-12)
  In6.Cu w0.08: v7(-19.46,-18.71) -20.24,-17.93 -20.24,-12.39 -19.85,-12 v2(-18.62,-12)
  In8.Cu w0.08: v1(-21.27,28.08) -21.27,29.59 -21.03,29.83 -20.57,29.83 v2(-20.23,29.49) ; v1(-11.73,27.54) -11.73,25.66 -10.91,24.84 -10.91,22.44 -10.68,22.21 v1(-10.68,21.5) ; v2(-8.7,-19.96) -8.04,-20.62 v1(5.78,-20.62)
  B.Cu w0.08: v1(-21.27,28.08) -13.69,28.08 -13.15,27.54 v1(-11.73,27.54) ; J15.53@-21.25,-12.32 -19.68,-12.32 -19.36,-12 v2(-18.62,-12) ; v2(-20.23,29.49) v2@-20.21,29.51 ; v1(-10.68,21.5) -10.68,21.445 U61.B1@-10.615,21.38
  B.Cu w0.4: v2@-20.21,29.51 U51.H13@-20.21,30.3
CPU_D11: J15.54 U28.38 U51.H9 U61.A2 U76.P11 | length 136.6
  F.Cu w0.08: U28.38@-37.635,-29.37 -37.635,-26.925 -35.34,-24.63 v2(-28.27,-24.63)
  In4.Cu w0.08: v2(-28.27,-24.63) -28.27,-24.06 -27.69,-23.48 -22.54,-23.48 -21.03,-21.97 -21.03,-19.43 -19.5,-17.9 v2(-19.5,-17.71)
  In8.Cu w0.08: v1(-26.28,-5.71) -26.28,-0.46 -26.72,-0.02 -26.72,2.92 -26.66,2.98 -26.66,5.03 -27.09,5.46 -27.3,5.46 -27.6,5.76 -27.6,6.14 -26.88,6.86 -26.88,8.16 -27.29,8.57 -27.29,10.95 -27.15,11.09 -27.15,12.41 -27.17,12.43 -27.22,12.48 -27.22,12.79 -27.22,12.93 -26.98,13.17 -26.96,13.19 -26.96,17.45 -26.96,17.49 -27.05,17.58 -27.07,17.6 -27.07,17.71 -27.07,17.96 -26.72,18.31 -26.59,18.44 -24.07,18.44 -23.93,18.44 -23.79,18.3 -23.76,18.27 -22.82,18.27 -22.77,18.27 v1(-22.36,18.68) -22.33,18.71 -12.27,18.71 -12.11,18.87 v1(-12.11,19.59) ; v1(-20.89,35.33) -21.26,35.33 -21.5,35.09 -21.5,28.76 -22.15,28.11 -22.15,25.74 -20.64,24.23 v1(-19.72,24.23) ; v1(-20.67,20.17) -20.67,20.74 -20.35,21.06 -20.35,22.51 v1(-19.72,23.14) ; v1(-20.53,-6.16) -20.53,-9.72 -21.25,-10.44 v1(-21.25,-11.82) -21.24,-11.83 -21.24,-17.7 ; v2(-19.5,-17.71) -21.23,-17.71 -21.24,-17.7 ; v1(4.7,-19.97) 4.08,-19.35 -8.7,-19.35 -8.83,-19.48 -9.65,-19.48 -9.78,-19.35 -12.74,-19.35 -12.93,-19.54 -19.65,-19.54 -21.24,-17.95 -21.24,-17.7
  B.Cu w0.08: v1(-26.28,-5.71) -20.98,-5.71 v1(-20.53,-6.16) ; v1(-22.36,18.68) -22.36,18.9 -21.09,20.17 v1(-20.67,20.17) ; v1(-20.89,35.33) -20.84,35.38 U51.H9@-20.21,35.38 ; v1(-19.72,23.14) v1(-19.72,24.23) ; v1(-12.11,19.59) -11.885,19.815 U61.A2@-11.885,20.11 ; U76.P11@4.67,-20.55 4.67,-20 v1(4.7,-19.97)
CPU_D12: J15.56 U28.40 U51.H12 U61.D4 U76.T12 | length 136.4
  In1.Cu w0.08: v3(-36.035,-29.37) -35.54,-28.875 v2(-35.54,-19.67)
  In5.Cu w0.08: v2(-35.54,-19.67) -33.97,-19.67 -33.46,-19.16 -29.06,-19.16 -28.63,-18.73 -27.11,-18.73 -26.67,-19.17 -24.96,-19.17 -24.875,-19.255 -18.22,-19.255 ; v2(-18.61,-16.9) -18.22,-17.29 -18.22,-19.255 ; v2(7.91,-21.25) 7.91,-20.13 7.035,-19.255 -18.22,-19.255
  In8.Cu w0.08: v1(-20.86,31.12) -19.81,30.07 -19.81,28.14 -18.11,26.44 -18.11,21.99 v1(-18.06,21.94) ; v1(-18.99,-9.27) -19.37,-9.27 -20.19,-8.45 -20.19,-6.74 -18.98,-5.53 -18.98,-2.69 -17.26,-0.97 -17.26,1.82 -18.31,2.87 -18.31,5.25 -18.58,5.52 -18.58,8.93 -19.33,9.68 -19.33,10.34 -18.91,10.76 -18.91,11 -18.77,11.14 -18.77,11.77 -18.94,11.94 -20.31,11.94 -20.56,12.19 -20.56,13.07 -18,15.63 v1(-18,16.65) ; v1(-17.15,19.9) -15.31,19.9 -15.06,20.15 -14.51,20.15 -14.41,20.05 -12.97,20.05 -12.85,20.17 v1(-12.85,21.94) ; v1(-11.63,21.95) -11.63,21.58 -11.42,21.37 -11.42,19.71 -10.6,18.89 -9.14,18.89 -8.6,18.35 -8.6,17.625 v1(-8.075,17.1)
  B.Cu w0.08: J15.56@-21.25,-10.82 -19.94,-10.82 -19.78,-10.66 -19.78,-10.45 -19.55,-10.22 -18.99,-10.22 ; v1(-20.86,31.12) -20.86,31.13 -20.42,31.57 U51.H12@-20.21,31.57 ; v1(-18.99,-9.27) -18.99,-10.22 ; v2(-18.61,-16.9) -18.61,-15.97 -19.09,-15.49 -19.09,-14.74 -18.39,-14.04 -17.26,-14.04 -16.7,-13.48 -16.7,-11.48 -17.96,-10.22 -18.99,-10.22 ; v1(-18.06,21.94) -17.15,21.03 v1(-17.15,19.9) -17.15,17.5 v1(-18,16.65) ; v1(-12.85,21.94) -11.64,21.94 v1(-11.63,21.95) ; v1(-8.075,17.1) U61.D4@-8.075,17.57 ; U76.T12@7.21,-21.82 7.78,-21.25 v2(7.91,-21.25)
CPU_D13: J15.57 U28.41 U51.H11 U61.B3 U76.R12 | length 123
  F.Cu w0.08: U28.41@-35.235,-29.37 -35.235,-27.095 -34.17,-26.03 -27.78,-26.03 -27.69,-26.12 -24.58,-26.12 -24.29,-26.41 v3(-23.67,-26.41)
  In1.Cu w0.08: v3(-23.67,-26.41) -23.24,-25.98 -23.24,-23 -23.71,-22.53 -23.71,-20.83 v2(-22.87,-19.99)
  In4.Cu w0.08: v2(-22.88,-10.92) -22.85,-10.92 -22.36,-11.41 -22.36,-19.48 v2(-22.87,-19.99)
  In5.Cu w0.08: v2(-22.87,-19.99) -15.05,-19.99 -14.48,-20.56 6.08,-20.56 6.69,-21.17 v2(6.69,-21.25)
  In8.Cu w0.08: v2(-22.88,-10.92) -22.33,-10.37 -22.33,-8.94 -22.62,-8.65 -22.62,-6.34 -22.25,-5.97 -22.25,-4.82 -22.07,-4.64 -22.07,3.44 -21.93,3.58 -21.93,4.12 -22.08,4.27 -22.08,6.58 -21.45,7.21 -21.45,11.14 -21.14,11.45 -21.14,13.05 v1(-18.3,15.89) ; v1(-20.12,32.65) -19.8,32.33 -19.8,30.53 -19.62,30.35 -19.62,28.26 -17.91,26.55 -17.91,22.38 -17.66,22.13 -17.66,21.77 -17.85,21.58 -17.85,21.19 v1(-17.86,21.18) ; v1(-17.85,20.53) -17.18,20.53 -16.41,21.3 -15.83,21.3 v1(-15.05,20.52) ; v1(-17,15.91) -15.81,15.91 v1(-15.19,16.53) ; v1(-15.19,18.18) -11.58,18.18 -11.575,18.175 v1(-10.615,18.175)
  B.Cu w0.08: U51.H11@-20.21,32.84 -20.12,32.75 v1(-20.12,32.65) ; v1(-18.3,15.89) -17.02,15.89 v1(-17,15.91) ; v1(-17.86,21.18) -17.85,21.17 v1(-17.85,20.53) ; v1(-15.19,16.53) v1(-15.19,18.18) -15.19,19.38 -15.3,19.49 -15.3,19.95 -15.05,20.2 v1(-15.05,20.52) ; v1(-10.615,18.175) U61.B3@-10.615,18.84 ; U76.R12@5.94,-21.82 6.11,-21.82 6.68,-21.25 v2(6.69,-21.25)
  B.Cu w0.2: v2(-22.88,-10.92) -22.88,-10.52 -22.68,-10.32 J15.57@-21.25,-10.32
CPU_D14: J15.58 U28.42 U51.J13 U61.A3 U76.P12 | length 126.4
  F.Cu w0.08: U28.42@-34.435,-29.37 -34.435,-28.185 -32.51,-26.26 -27.91,-26.26 -27.86,-26.31 -24.92,-26.31 -24.55,-26.68 -24.07,-26.68 -23.74,-27.01 v2(-23.74,-28.7)
  In8.Cu w0.08: v2(-23.74,-28.7) -23.74,-26.24 -22.73,-25.23 -22.73,-23.43 -22.23,-22.93 -22.23,-19.15 -21.55,-18.47 -21.02,-18.47 -19.77,-19.72 -12.78,-19.72 -12.61,-19.55 -9.91,-19.55 -8.63,-20.83 4.31,-20.83 v1@4.74,-21.26 ; v1(-22.71,-9.95) -22.71,-9.68 -22.52,-9.49 -22.52,-9.04 -22.83,-8.73 -22.83,-6.28 -22.46,-5.91 -22.46,-4.85 -22.98,-4.33 -22.98,3.44 -23.11,3.57 -23.11,4.09 -22.97,4.23 -22.97,8.1 -22.11,8.96 -21.95,8.96 -21.67,9.24 -21.67,11.29 -21.38,11.58 -21.38,13.5 -21.29,13.59 -20.98,13.59 -18.65,15.92 -18.65,16.48 -18.15,16.98 -15.89,16.98 -15.58,17.29 -13.89,17.29 v1(-13.87,17.31) ; -21.54,-18.47 -21.54,-10.25 -21.12,-9.83 v1(-21.12,-8.29) ; v1(-13.82,19.45) -13.81,19.46 v1(-12.9,19.46) -12.34,20.02 -12.34,25.93 -12.4,25.99 v1(-12.4,28.46)
  B.Cu w0.08: J15.58@-21.21,-9.83 -19.74,-9.83 -19.42,-9.51 -19.42,-8.89 -20.02,-8.29 v1(-21.12,-8.29) ; U51.J13@-18.94,30.3 -18.94,29.24 -18.16,28.46 v1(-12.4,28.46) ; v1(-13.87,17.31) -13.86,17.32 -13.86,19.41 v1(-13.82,19.45) ; v1(-12.9,19.46) -12.9,19.11 -12.63,18.84 U61.A3@-11.885,18.84 ; U76.P12@4.67,-21.82 4.67,-21.33 v1(4.73,-21.27)
  B.Cu w0.2: v1(-22.71,-9.95) -22.58,-9.82 J15.58@-21.25,-9.82
CPU_D15: J15.59 U28.43 U51.J12 U61.C4 U76.T13 | length 150.7
  In1.Cu w0.08: v3(-33.635,-29.37) -32.955,-28.69 v2(-32.26,-28.69)
  In3.Cu w0.08: v2(-32.26,-28.69) -31.6,-29.35 -27.42,-29.35 -26.83,-29.94 -24.38,-29.94 -23.95,-29.51 -22.99,-29.51 -22.89,-29.61 -7.7,-29.61 -7.26,-30.05 v2(-6.91,-30.05) ; v2(-19.97,0.95) -19.97,1.1 -20.56,1.69 -23.15,1.69 -24.07,2.61 -24.07,8.59 -19.81,12.85 -17.03,12.85 -16.37,13.51 -15.58,13.51 -14.92,12.85 v2(-14.92,12.74)
  In4.Cu w0.08: v2(-28.11,-26.66) -27.47,-26.02 -27.47,-25.42 -27.76,-25.13 -28.53,-25.13 -28.69,-24.97 -28.69,-23.14 -27.86,-22.31 -25.88,-22.31 -24.28,-20.71 -22.6,-20.71 -22.14,-20.25 -22.14,-10.73 -22.95,-9.92 v2(-22.95,-9.32) -20.8,-9.32 -20.35,-8.87 -20.35,-6.26 -21.45,-5.16 -21.45,0.04 -20.54,0.95 v2(-19.97,0.95)
  In6.Cu w0.08: v2(-32.26,-28.69) -32.26,-27.46 -31.46,-26.66 v2(-28.11,-26.66)
  In8.Cu w0.08: v1(-15.84,22.46) -15.22,23.08 -14.68,23.08 v1(-14.1,23.66) ; v1(-15.57,15.73) -15.14,16.16 -14.27,16.16 -13.23,15.12 -10.51,15.12 -10.24,15.39 -10.24,16.05 v1(-9.37,16.92) ; v1(-15.15,28.75) -15.15,25.18 -14.69,24.72 v1(-14.1,24.72) ; v2(-6.91,-30.05) -6.44,-30.05 -6.2,-29.81 -1.93,-29.81 -1.13,-29.01 v1(-1.13,-28.63) ; v1(7.64,-27.67) 7.41,-27.44 7.41,-23.68 v1(7.91,-23.18)
  B.Cu w0.08: v2(-22.95,-9.32) v2@-22.94,-9.33 ; U51.J12@-18.94,31.57 -18.55,31.57 -18.26,31.28 -18.26,31.24 -18.27,31.23 -18.27,29.61 -17.41,28.75 v1(-15.15,28.75) ; v1(-15.84,22.46) -15.84,21.44 -15.4,21 -15.4,20.33 -15.89,19.84 -15.89,16.05 v1(-15.57,15.73) -15.02,15.18 -14.82,15.18 -14.16,14.52 -14.16,13.5 v2(-14.92,12.74) ; v1(-14.1,23.66) v1(-14.1,24.72) ; v1(-9.37,16.92) -9.345,16.945 U61.C4@-9.345,17.57 ; v1(-1.13,-28.63) 6.68,-28.63 v1(7.64,-27.67) ; U76.T13@7.21,-23.09 7.26,-23.14 7.87,-23.14 v1(7.91,-23.18)
  B.Cu w0.3: v2(-22.95,-9.32) J15.59@-21.25,-9.32
CPU_D16: J15.22 U33.2 U51.B2 U61.D5 U76.P13 | length 165.6
  F.Cu w0.08: v2(-26.54,-25.09) -24.21,-25.09 -23.09,-26.21 -23.09,-26.63 -22.435,-27.285 -18.88,-27.285 ; U33.2@-18.88,-31.8 -18.88,-27.285 ; v2(-17.41,-30.87) -17.41,-27.56 -17.685,-27.285 -18.88,-27.285
  In5.Cu w0.08: v2(-30.07,44.92) -29.54,45.45 -13.29,45.45 -13.12,45.28 -12.56,45.28 -12.23,44.95 -12.23,43.65 -12.93,42.95 -13.45,42.95 -13.83,42.57 -13.83,40.13 -13.23,39.53 -9.51,39.53 v2(-8.65,38.67)
  In8.Cu w0.08: v2(-26.54,-25.09) -26.61,-25.02 -26.61,-19.68 v1(-26.25,-19.32) ; v1(-15.48,-14.4) -15.48,-13.94 -15.64,-13.78 -15.64,-5.48 -15.51,-5.35 -15.51,6.84 -14.85,7.5 -14.39,7.5 -14.13,7.76 -14.13,8.22 -13.82,8.53 -13.6,8.53 -13.51,8.62 -13.09,8.62 -12.99,8.52 -9.38,8.52 -8.98,8.92 -6.88,8.92 -6.82,8.98 -6.82,9.43 -7.12,9.73 -7.12,11.66 -7.47,12.01 -7.47,15.37 -8.025,15.925 v1(-8.055,15.925) ; v1(-12.65,-23.23) -0.58,-23.23 -0.11,-23.7 -0.11,-25.62 0.35,-26.08 0.82,-26.08 2.43,-24.47 3.46,-24.47 4.09,-23.84 v1(4.09,-23.5) ; v2(-8.65,38.67) -8.26,38.67 -8.1,38.51 -8.1,36.69 -8.02,36.61 -8.02,26.38 -7,25.36 -5.7,25.36 -5.53,25.19 -5.53,24.57 -5.58,24.52 -5.58,24.15 -5.89,23.84 -6.07,23.84 -6.73,23.18 -6.73,21.44 -6.27,20.98 -6.27,18.7 -6.54,18.43 v1(-6.54,18.13)
  B.Cu w0.08: v2(-30.07,44.92) -28.48,44.92 U51.B2@-27.83,44.27 ; v2(-17.41,-30.87) -14.02,-30.87 -13.9,-30.75 -13.9,-23.25 -13.89,-23.24 ; v1(-15.48,-14.4) -14.5,-14.4 -14.18,-14.72 -14.18,-16.74 -13.9,-17.02 -13.9,-23.23 -13.89,-23.24 ; v1(-12.65,-23.23) -13.88,-23.23 -13.89,-23.24 ; U61.D5@-8.075,16.3 -7.39,16.985 -7.39,17.81 -7.07,18.13 v1(-6.54,18.13) ; v1(-8.055,15.925) U61.D5@-8.055,16.275 ; v1(4.09,-23.5) 4.26,-23.5 U76.P13@4.67,-23.09
CPU_D17: J15.23 U33.3 U51.B1 U61.B4 U76.R16 | length 155.4
  In1.Cu w0.08: v3(-19.705,-31.775) -19.58,-31.65 -19.58,-28.3 v2(-19.68,-28.2)
  In3.Cu w0.08: v2(-26.63,-29.55) -24.4,-29.55 -24.13,-29.28 -22.83,-29.28 -21.75,-28.2 v2(-19.68,-28.2)
  In4.Cu w0.08: v2(-34.06,39.29) -34.36,38.99 -34.36,37.61 -33.98,37.23 -33.98,24.56 -33.28,23.86 -30.64,23.86 -27.39,20.61 -23.42,20.61 v2(-22.95,21.08) ; v2(-28.03,-19.29) -27.91,-19.41 -26.63,-19.41 -26.3,-19.08 v2(-26.3,1.12)
  In5.Cu w0.08: v2(-19.68,-28.2) -19.66,-28.18 3.48,-28.18 3.98,-27.68 v2(6.59,-27.68)
  In6.Cu w0.08: v2(-28.03,-19.29) -27.48,-19.29 -26.18,-20.59 -26.18,-28.16 -26.63,-28.61 v2(-26.63,-29.55)
  In8.Cu w0.08: v2(-34.06,39.29) -34.42,39.65 -34.42,40.65 -34.19,40.88 -34.19,43.54 -33.72,44.01 v1(-31.98,44.01) ; v2(-26.3,1.12) -26.3,4.99 -26.68,5.37 -26.68,7.96 -25.81,8.83 -25.81,9.98 -25.47,10.32 -25.47,11.21 -26.05,11.79 -26.05,14.2 -26.22,14.37 -26.55,14.37 -26.75,14.57 -26.75,14.89 -25.74,15.9 v1(-25.74,16.82) ; v1(-23.29,16.98) -22.98,16.98 -22.87,16.87 -22.02,16.87 -21.54,16.39 -20.82,16.39 v1(-20.47,16.74) ; v1(-17.28,16.22) -16.33,16.22 -15.44,17.11 -14.37,17.11 -13.16,15.9 -12.43,15.9 -12.12,16.21 -11.25,16.21 v1(-10.54,16.92)
  B.Cu w0.08: v1(-31.98,44.01) -31.66,44.01 -31.1,44.57 -31.1,45.21 -30.81,45.5 -30.64,45.5 -30.38,45.76 -30.38,45.98 -30.05,46.31 -28.6,46.31 U51.B1@-27.83,45.54 ; v1(-25.74,16.82) -23.94,16.82 -23.78,16.98 v1(-23.29,16.98) -23.29,19.23 -23.62,19.56 -23.62,20.81 -23.35,21.08 v2(-22.95,21.08) ; v1(-20.47,16.74) -18.63,16.74 -18.46,16.57 -18.46,16.4 -18.24,16.18 -17.32,16.18 v1(-17.28,16.22) ; U61.B4@-10.615,17.57 -10.54,17.495 v1(-10.54,16.92) ; U76.R16@5.94,-26.9 5.94,-27.04 6.58,-27.68 v2(6.59,-27.68)
  B.Cu w0.2: v2(-28.03,-19.29) -28.03,-19.53 -27.74,-19.82 J15.23@-26.25,-19.82
CPU_D18: J15.24 U33.4 U51.C2 U61.A4 U76.P16 | length 159.8
  In1.Cu w0.08: v3(-20.505,-31.775) -20.48,-31.75 v2(-20.48,-30.16)
  In4.Cu w0.08: v2(-27.31,-24.43) -27.3,-24.44 -24.21,-24.44 -20.67,-27.98 -20.67,-29.19 -20.48,-29.38 v2(-20.48,-30.16)
  In5.Cu w0.08: v2(-20.48,-30.16) -20.45,-30.13 -12.45,-30.13 -11.64,-30.94 v2(-11.64,-33.09)
  In8.Cu w0.08: v1(-37.31,-20.38) -37.31,-17.35 -37.81,-16.85 -37.81,-8.11 -39.05,-6.87 -39.05,5.71 -36.89,7.87 -34.34,7.87 -33.72,8.49 -33.72,15.08 -32.55,16.25 -31.19,16.25 -30.97,16.47 -30.97,17.57 v1(-31.47,18.07) -31.47,25.21 -31.57,25.31 -31.57,35.87 -31.43,36.01 -31.43,37.46 -31.55,37.58 -31.55,38.54 -31.48,38.61 -31.48,43.67 -30.96,44.19 v1(-26.83,44.19) ; v1(-29.64,19.59) -29.25,19.59 -29.09,19.43 -16.92,19.43 -16.76,19.59 v1(-16.4,19.59) ; v1(-28.42,-20.37) -27.87,-20.37 -27.31,-20.93 v2(-27.31,-24.43) ; v1(-16.38,17.49) -16.03,17.49 -15.85,17.67 -14.78,17.67 -14.67,17.78 -12.43,17.78 v1(-12.12,17.47) ; v2(-11.64,-33.09) -10.97,-32.42 3.17,-32.42 3.8,-31.79 3.8,-27.71 4.52,-26.99 v1(4.52,-26.97)
  B.Cu w0.08: v1(-37.31,-20.38) -28.43,-20.38 v1(-28.42,-20.37) -28.37,-20.32 J15.24@-26.25,-20.32 ; v1(-31.47,18.07) -29.94,18.07 -29.61,18.4 -29.61,19.56 v1(-29.64,19.59) ; v1(-26.83,44.19) -26.64,44.19 U51.C2@-26.56,44.27 ; v1(-16.4,19.59) -16.4,17.51 v1(-16.38,17.49) ; v1(-12.12,17.47) -11.985,17.47 U61.A4@-11.885,17.57
CPU_D19: J15.25 U33.5 U51.E5 U61.C5 U76.P15 | length 168.7
  F.Cu w0.08: v2(-28.07,-30.89) -27.75,-30.57 -26.46,-30.57 -25.6,-29.71 -22.17,-29.71 -21.305,-30.575 U33.5@-21.305,-31.775 -21.305,-32.765 -21.03,-33.04 -17.43,-33.04 v2(-17.41,-33.06)
  In8.Cu w0.08: v1(-35.98,-20.69) -35.98,-19.21 -36.23,-18.96 -36.23,-3.69 -37.72,-2.2 -37.72,0.05 -30.68,7.09 -30.68,9.64 -30.25,10.07 -30.25,15.37 -30.42,15.54 -30.42,18.35 -30.61,18.54 -30.61,19.7 v1(-30.59,19.72) -30.19,20.12 -29.16,20.12 -28.81,19.77 v1(-28.05,19.77) ; v1(-32.95,20.49) -32.95,31.61 -33.44,32.1 -33.42,32.12 -33.42,34.93 -32.97,35.38 v1(-31.96,35.38) ; v1(-31.05,35.38) -31.05,37.5 -30.78,37.77 -30.78,39.63 -29.67,40.74 -28.36,40.74 -28.07,40.45 -28.07,37.8 -27.96,37.69 -26.32,37.69 -25.87,38.14 -25.87,38.77 v1(-24.51,40.13) ; v1(-29.87,-20.94) -29.87,-27.06 -28.19,-28.74 -28.19,-30.24 -28.07,-30.36 v2(-28.07,-30.89) ; v1(-26.75,17.75) -26.23,18.27 -24.82,18.27 -24.61,18.06 -21.31,18.06 -20.88,18.49 -10.31,18.49 -10.06,18.24 v1(-10.06,17.99) ; v2(-17.41,-33.06) -16.97,-32.62 -16.97,-30.55 -16.48,-30.06 -10.33,-30.06 -9.68,-30.71 -0.94,-30.71 -0.14,-29.91 -0.14,-27.76 1.56,-26.06 4.16,-26.06 v1(4.53,-25.69)
  B.Cu w0.08: v1(-35.98,-20.69) -35.71,-20.96 -29.89,-20.96 v1(-29.87,-20.94) -29.5,-20.94 -29.38,-20.82 -26.22,-20.82 J15.25@-26.21,-20.83 ; v1(-32.95,20.49) -32.28,20.49 -31.51,19.72 v1(-30.59,19.72) ; v1(-31.96,35.38) v1(-31.05,35.38) ; v1(-28.05,19.77) -28.05,20.06 -27.85,20.26 -27.54,20.26 -27.31,20.03 -27.31,18.31 v1(-26.75,17.75) ; v1(-24.51,40.13) -24.35,40.13 U51.E5@-24.02,40.46 ; v1(-10.06,17.99) -10.06,17.015 U61.C5@-9.345,16.3
CPU_D20: J15.27 U33.7 U51.C1 U61.F6 U76.N16 | length 171.5
  F.Cu w0.3: U33.7@-22.905,-31.775 -22.905,-30.765 v2(-22.84,-30.7)
  In1.Cu w0.08: v2(-27.17,-25.07) -27.17,-25.66 -26.27,-26.56 -26.27,-26.78 -22.84,-30.21 v2(-22.84,-30.7) ; v2(-8.35,41.83) -7.86,41.34 -7.86,33.67 -7.46,33.27 -7.46,23.63 -6.29,22.46 v2(-6.29,22.45)
  In3.Cu w0.08: v2(-22.84,-30.7) -22.13,-31.41 -17.39,-31.41 -16.46,-30.48 -11.263,-30.48 v2(-11.203,-30.54)
  In6.Cu w0.08: v2(-11.203,-30.54) -11.203,-30.003 -10.55,-29.35 -7.375,-29.35 -6.775,-28.75 -6.775,-7.425 -6.2,-6.85 -6.2,-2.75 -6.3,-2.65 -6.3,1.1 -5.05,2.35 -5.05,3.975 -5.425,4.35 -5.425,17.9 -6.3,18.775 -6.3,22.44 v2(-6.29,22.45)
  In8.Cu w0.08: v1(-26.13,48.55) -26.07,48.49 -20.35,48.49 -19.56,49.28 -19.56,51.87 -19.97,52.28 -19.97,54.24 -19.49,54.72 -18.71,54.72 -17.88,53.89 -17.03,53.89 -16.33,53.19 -16.33,52.6 -14.8,51.07 -9.88,51.07 -9.51,50.7 -9.51,46.47 -9.39,46.35 -9.39,44.85 -8.35,43.81 -8.35,41.84 ; v1(-11.17,-31.39) -11.15,-31.41 0.39,-31.41 1.24,-30.56 1.24,-26.81 1.68,-26.37 3.03,-26.37 v1(3.45,-26.79) ; v2(-6.29,22.45) -6.29,21.66 -6.05,21.42 -6.05,19.05 -5.24,18.24 -5.24,14.33 v1(-5.22,14.31)
  B.Cu w0.08: v2(-27.17,-25.07) -27.45,-25.07 -27.77,-24.75 -27.77,-23.05 -28.26,-22.56 -28.26,-22.02 -28.06,-21.82 -26.22,-21.82 J15.27@-26.21,-21.83 ; U51.C1@-26.56,45.54 -26.56,46.37 -26.13,46.8 v1(-26.13,48.55) ; v2(-11.203,-30.54) -11.17,-30.573 v1(-11.17,-31.39) ; U61.F6@-5.52,15 -5.52,14.61 v1(-5.22,14.31)
CPU_D21: J15.28 U33.8 U51.D2 U61.B5 U76.N15 | length 155.3
  F.Cu w0.3: v2(-23.73,-30.71) -23.705,-30.735 U33.8@-23.705,-31.775
  In1.Cu w0.08: v2(-25.7,-30.52) -25.69,-30.53 -24.76,-30.53 -24.6,-30.69 -24.58,-30.69 -24.55,-30.72 -23.74,-30.72 v2(-23.73,-30.71)
  In6.Cu w0.08: v2(-30.73,-1.61) -31.22,-2.1 -31.22,-5.96 -29.37,-7.81 -29.37,-22.15 -28.93,-22.59 -28.93,-25.81 -28.63,-26.11 -27.83,-26.11 -27.53,-26.41 -27.53,-29.4 -26.41,-30.52 v2(-25.7,-30.52)
  In8.Cu w0.08: v1(-31.02,20.63) -31.02,21.52 -30.94,21.6 -30.94,33.75 v1(-30.91,33.78) ; v1(-30.98,42.26) -31.3,41.94 -31.3,38.43 -31.38,38.35 -31.38,37.72 -31.25,37.59 -31.25,35.82 -31.35,35.72 -31.35,34.86 v1(-30.94,34.45) ; v1(-30.77,41.61) -30.15,41.61 -29.73,42.03 -29.73,42.3 -28.48,43.55 -25.74,43.55 v1(-25.23,44.06) ; -30.73,-1.6 v2(-30.73,-1.61) -30.73,-1.21 -30.43,-0.91 -30.43,7.91 -29.67,8.67 -29.67,10.65 -29.78,10.76 -29.78,12.1 -29.44,12.44 -29.05,12.83 -29.05,13.39 -29.05,19.06 -29.04,19.07 ; v1(-30.08,19.66) -30.08,19.38 -29.77,19.07 -28.53,19.07 -28.39,19.21 -14.8,19.21 -14.67,19.34 -14.28,19.34 v1(-14.25,19.31) ; v1(-26.25,-22.32) -25.7,-22.87 v2(-25.7,-30.52) ; v1(-15.18,-31.32) -14.45,-32.05 1.88,-32.05 2.75,-31.18 v1(2.75,-27.49) ; v1(-13.36,17.1) -13.18,16.92 -11.76,16.92 -11.46,17.22 -10.31,17.22 -10.16,17.07 -10.16,16.46 -10.65,15.97 v1(-10.65,15.59)
  B.Cu w0.08: v1(-31.02,20.63) -31.02,20.6 v1(-30.08,19.66) ; v1(-30.98,42.26) -30.77,42.05 v1(-30.77,41.61) ; v1@-30.94,33.81 v1(-30.91,33.78) ; U51.D2@-25.29,44.27 -25.23,44.21 v1(-25.23,44.06) ; v2(-23.73,-30.71) -23.12,-31.32 v1(-15.18,-31.32) ; v1(-14.25,19.31) -14.25,17.04 -14.01,16.8 -13.66,16.8 v1(-13.36,17.1) ; v1(-10.65,15.59) -10.6,15.64 U61.B5@-10.6,16.27 ; v1(2.75,-27.49) 2.75,-26.28 U76.N15@3.4,-25.63
  B.Cu w0.1: v1@-30.94,33.81 v1(-30.94,34.45)
CPU_D22: J15.29 U33.9 U51.E3 U61.A5 U76.M16 | length 189.9
  In1.Cu w0.08: v2(-27.68,-30.1) -27.33,-30.45 -26.4,-30.45 -25.075,-31.775 v3(-24.505,-31.775)
  In8.Cu w0.08: v1(-44.28,-29.12) -44.28,11.41 -42.79,12.9 -41.79,12.9 -40.24,14.45 -37.27,14.45 -36.5,15.22 -36.5,16.14 -37.49,17.13 -37.49,17.68 -36.75,18.42 v1(-35.85,18.42) ; v1@-35.85,18.44 -35.85,23.29 -34.04,25.1 -33.84,25.3 -33.84,37.46 -33.61,37.69 -31.99,37.69 -31.77,37.91 -31.77,38.61 -31.67,38.71 -31.67,43.85 -31.12,44.4 -28,44.4 v1(-27.58,44.82) ; v1(-29.91,18.61) -29.35,18.05 v1(-29.35,14.19) ; v2(-27.68,-30.1) -27.68,-29.1 -26.1,-27.52 -26.1,-23.85 -26.25,-23.7 v1(-26.25,-22.82) ; v1(-15.73,14.1) -15.73,14.68 -15.4,15.01 v1(-13.98,15.01) ; v1(-13.58,15.9) -13.33,15.65 v1(-11.93,15.65) ; v1(-11.64,-31.68) 0.75,-31.68 1.54,-30.89 1.54,-27.43 v1(1.99,-26.98)
  B.Cu w0.08: v1(-44.28,-29.12) -42.9,-29.12 -42.71,-29.31 -39.12,-29.31 -38.87,-29.06 -28.72,-29.06 v2(-27.68,-30.1) -27.36,-30.42 -26.35,-30.42 -24.4,-32.37 -16.19,-32.37 -16.11,-32.45 -12.42,-32.45 -11.65,-31.68 v1(-11.64,-31.68) ; v1(-35.85,18.42) -35.85,19.06 -34.98,19.93 -32.45,19.93 -31.13,18.61 v1(-29.91,18.61) ; v1(-29.35,14.19) -28.67,13.51 -19.16,13.51 -19.1,13.45 -18.38,13.45 -18.13,13.7 -16.13,13.7 v1(-15.73,14.1) ; v1(-27.58,44.82) -27.51,44.89 -23.78,44.89 -23.37,44.48 -23.37,43.65 U51.E3@-24.02,43 ; v1(-13.98,15.01) -13.98,15.5 v1(-13.58,15.9) ; v1(-11.93,15.65) -11.87,15.71 U61.A5@-11.87,16.27 ; v1(1.99,-26.98) 2.05,-26.98 U76.M16@2.13,-26.9
CPU_D23: J15.30 U33.10 U51.D1 U61.E6 U76.M15 | length 211.2
  F.Cu w0.08: v2(-23.75,-30.07) -24.45,-30.07 -25.305,-30.925 -25.305,-34.045 -24.51,-34.84 v2(-23.72,-34.84)
  In4.Cu w0.08: v2(-23.72,-34.84) -24.22,-34.34 -27.73,-34.34 -31.03,-31.04 -31.03,-14.25 -29.48,-12.7 -29.48,-7.22 -28.73,-6.47 -28.73,4.85 -30.5,6.62 -30.5,8.6 -27.33,11.77 -27.33,17.62 -25.75,19.2 -22.39,19.2 -20.56,21.03 -20.56,23.17 -22.22,24.83 -22.22,27.43 -21.59,28.06 -21.59,30.13 -18.83,32.89 -18.83,39.81 -15.78,42.86 -11.77,42.86 -9.41,40.5 v2(-8.39,40.5)
  In8.Cu w0.08: v1(-18.99,48.67) -18.45,48.67 -17.62,49.5 -17.62,51.47 -17.16,51.93 -16.59,51.93 -15.5,50.84 -10.04,50.84 -9.7,50.5 -9.7,46.38 -9.56,46.24 v1(-9.56,43.78) ; v1(-15.92,-29.62) -2.76,-29.62 -1.07,-27.93 -0.69,-27.93 1.54,-25.7 v1(2,-25.7) ; v1(-11.14,40.32) -10.8,40.32 -10.42,40.7 -9.25,40.7 -9.05,40.5 v2(-8.39,40.5) -8.03,40.5 -7.73,40.8 -7.73,42.3 -7.99,42.56 -7.99,43.51 -7.73,43.77 v1(-7.73,44.31) ; v1(-8.83,36.37) -8.83,35.04 -8.2,34.41 v1(-8.2,24.55) ; v1(-8.17,23.25) -8.17,21.72 -7.36,20.91 -7.36,17.32 -6.83,16.79 v1(-6.83,15.58)
  B.Cu w0.08: J15.30@-26.25,-23.32 -26.25,-24.34 -24.62,-25.97 -24.62,-29.2 v2(-23.75,-30.07) -23.3,-29.62 v1(-15.92,-29.62) ; U51.D1@-25.29,45.54 -24.44,46.39 -19.91,46.39 -18.99,47.31 v1(-18.99,48.67) ; v1(-11.14,40.32) -11.51,39.95 -11.51,39.77 -12.31,38.97 -12.31,37.85 -11.96,37.5 -11.96,37.14 -11.68,36.86 -11.38,36.86 -10.89,36.37 v1(-8.83,36.37) ; v1(-9.56,43.78) -9.06,44.28 -8.15,44.28 -8.12,44.31 v1(-7.73,44.31) ; v1(-8.2,24.55) -8.2,23.28 v1(-8.17,23.25) ; v1(-6.83,15.58) -6.785,15.535 U61.E6@-6.785,15.005 ; U76.M15@2.13,-25.63 U76.M15@2.18,-25.63
CPU_D24: J15.32 U33.35 U51.F4 U61.C6 U76.L15 | length 174.6
  In1.Cu w0.08: v3(-25.305,-43.05) -24.6,-42.345 -24.6,-33.39 v2(-24.62,-33.37)
  In3.Cu w0.08: v2(-31.73,-33.37) v2(-24.62,-33.37)
  In4.Cu w0.08: v2(-32.88,-12.22) -33.25,-12.22 -33.56,-12.53 -33.56,-27.24 -34.09,-27.77 -34.09,-31.01 v2(-31.73,-33.37)
  In8.Cu w0.08: v1(-31.88,28.09) -31.88,28.1 -31.87,28.11 -31.87,34.72 v1(-31.88,34.73) ; v1(-28.5,36.72) -26.45,36.72 -25.63,37.54 -25.63,38.69 -24.97,39.35 -23.87,39.35 -23.58,39.64 -23.58,40.68 -23.03,41.23 v1(-22.75,41.23) ; v1(-28.1,-5.59) -28.1,-5.17 -28.29,-4.98 -28.29,4.32 -28.71,4.74 -28.71,6.59 -28.21,7.09 -28.21,7.75 -28.47,8.01 -28.47,9.96 -28.08,10.35 -28.08,12.93 -27.33,13.68 -27.33,17.29 -27.44,17.4 -27.44,18.42 v1(-26.98,18.88) -26.67,18.88 -26.55,19 v1(-13.55,19) ; v2(-24.62,-33.37) -24.62,-23.69 v1(-24.34,-23.41) ; v1(-19.6,-22.87) -19.25,-22.52 -15.45,-22.52 -15.02,-22.09 0.05,-22.09 0.91,-22.95 0.91,-25.5 v1(0.9,-25.51) ; v1(-12.49,14.49) -12.19,14.49 -11.99,14.69 -9.655,14.69 v1(-9.345,14.38)
  B.Cu w0.08: v2(-32.88,-12.22) -33.87,-11.23 -33.87,-6.04 -33.41,-5.58 -31.42,-5.58 -31.25,-5.75 -28.75,-5.75 -28.59,-5.59 v1(-28.1,-5.59) ; v1(-31.88,28.09) -31.46,28.09 -30.85,27.48 -30.85,24.72 -30.16,24.03 -27.67,24.03 -27.44,23.8 -27.44,22.52 -28.09,21.87 -28.09,21.4 -26.98,20.29 v1(-26.98,18.88) ; v1(-31.88,34.73) -28.84,34.73 -28.5,35.07 v1(-28.5,36.72) ; v1(-24.34,-23.41) -23.75,-22.82 -21.22,-22.82 J15.32@-21.21,-22.83 ; v1(-22.75,41.23) U51.F4@-22.75,41.73 ; v1(-13.55,19) -13.55,18.03 -12.96,17.44 -12.96,14.96 v1(-12.49,14.49) ; v1(-9.345,14.38) U61.C6@-9.345,15.03 ; U76.L15@0.86,-25.63 0.9,-25.59 v1(0.9,-25.51)
  B.Cu w0.2: v1@-19.64,-22.83 v1(-19.6,-22.87)
  B.Cu w0.3: J15.32@-21.25,-22.82 -19.65,-22.82 v1(-19.6,-22.87)